# Altium PCB Player.PcbDoc
Units mm, origin at the board's own origin, x right, y up, seen from the top; angles counter-clockwise.
Board outline 30 x 70 mm, 6 copper layers (Top Layer, Mid-Layer 1, Mid-Layer 2, Mid-Layer 3, Mid-Layer 4, Bottom Layer); 111 components, 92 nets, 486 pads, 99 vias.
Unrouted connection lines stored in the file: 260.
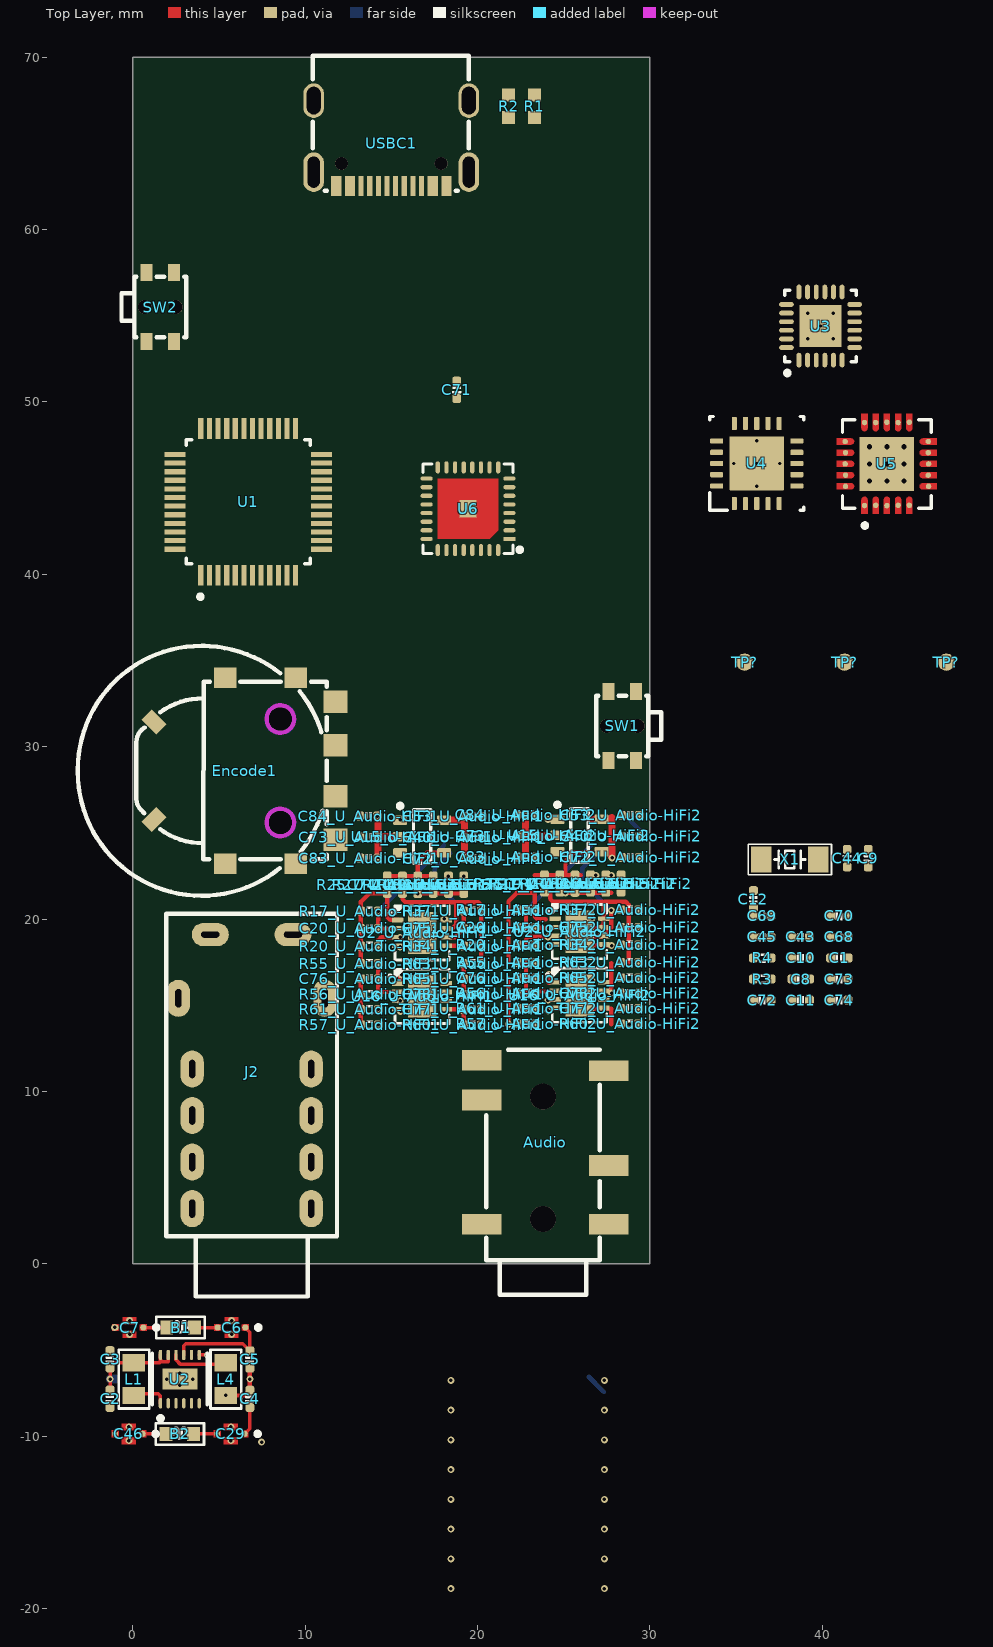
[diagram p0: Top Layer view]
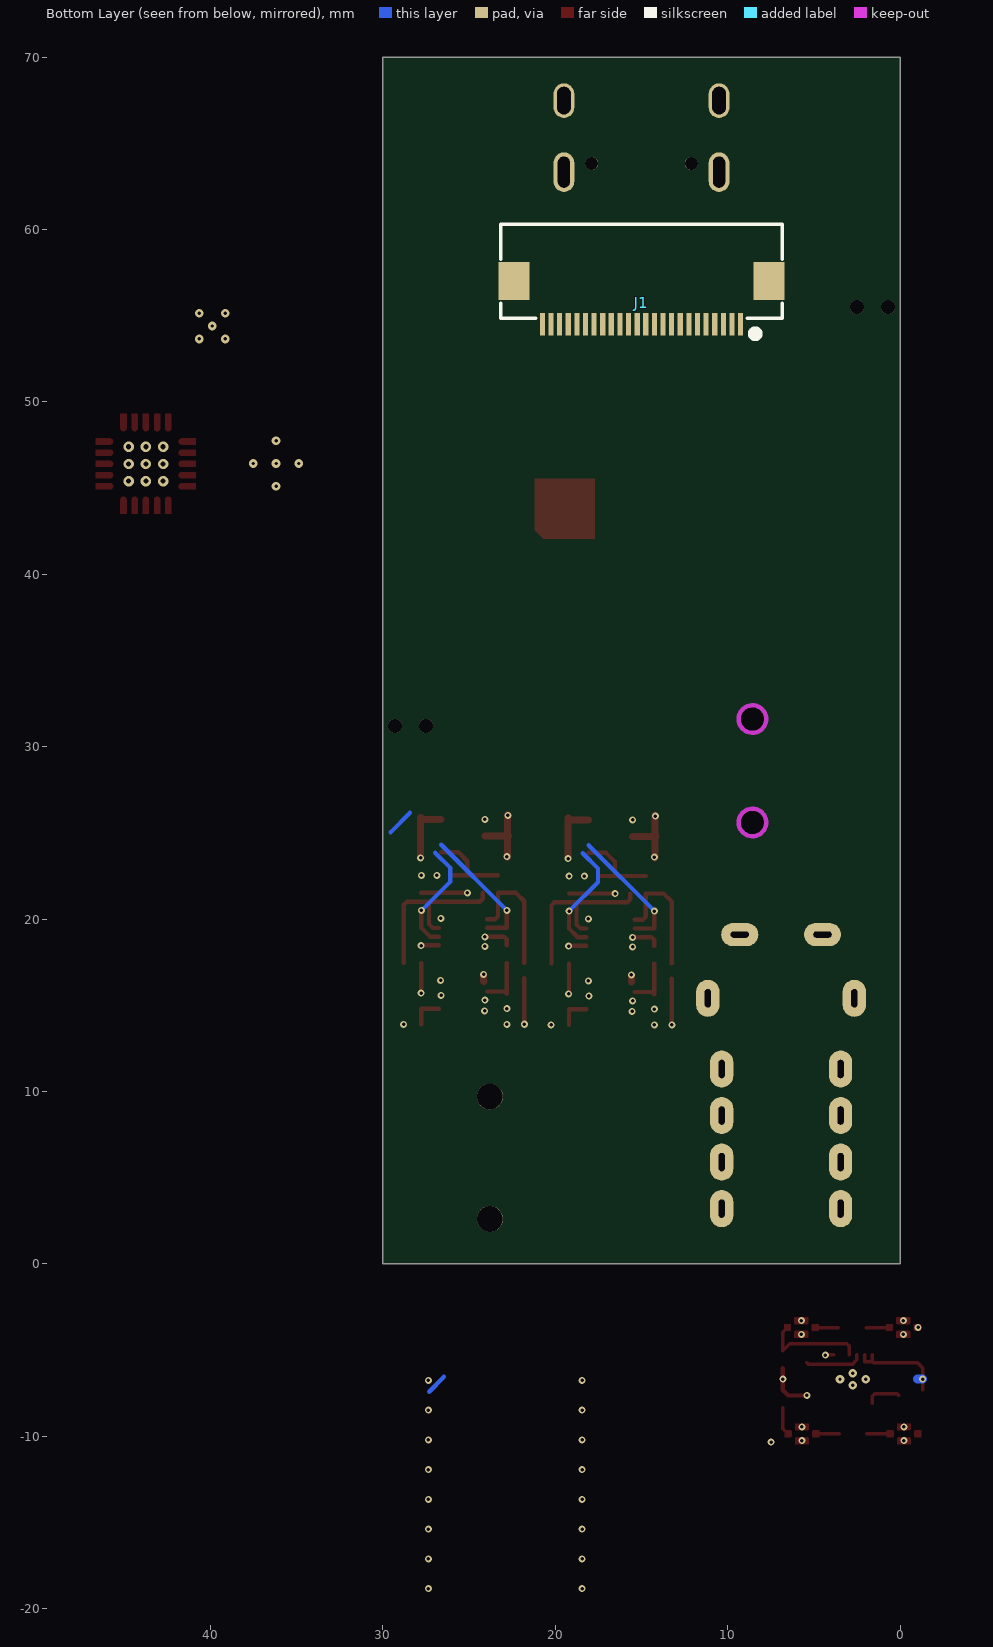
[diagram p1: Bottom Layer view, seen from below]
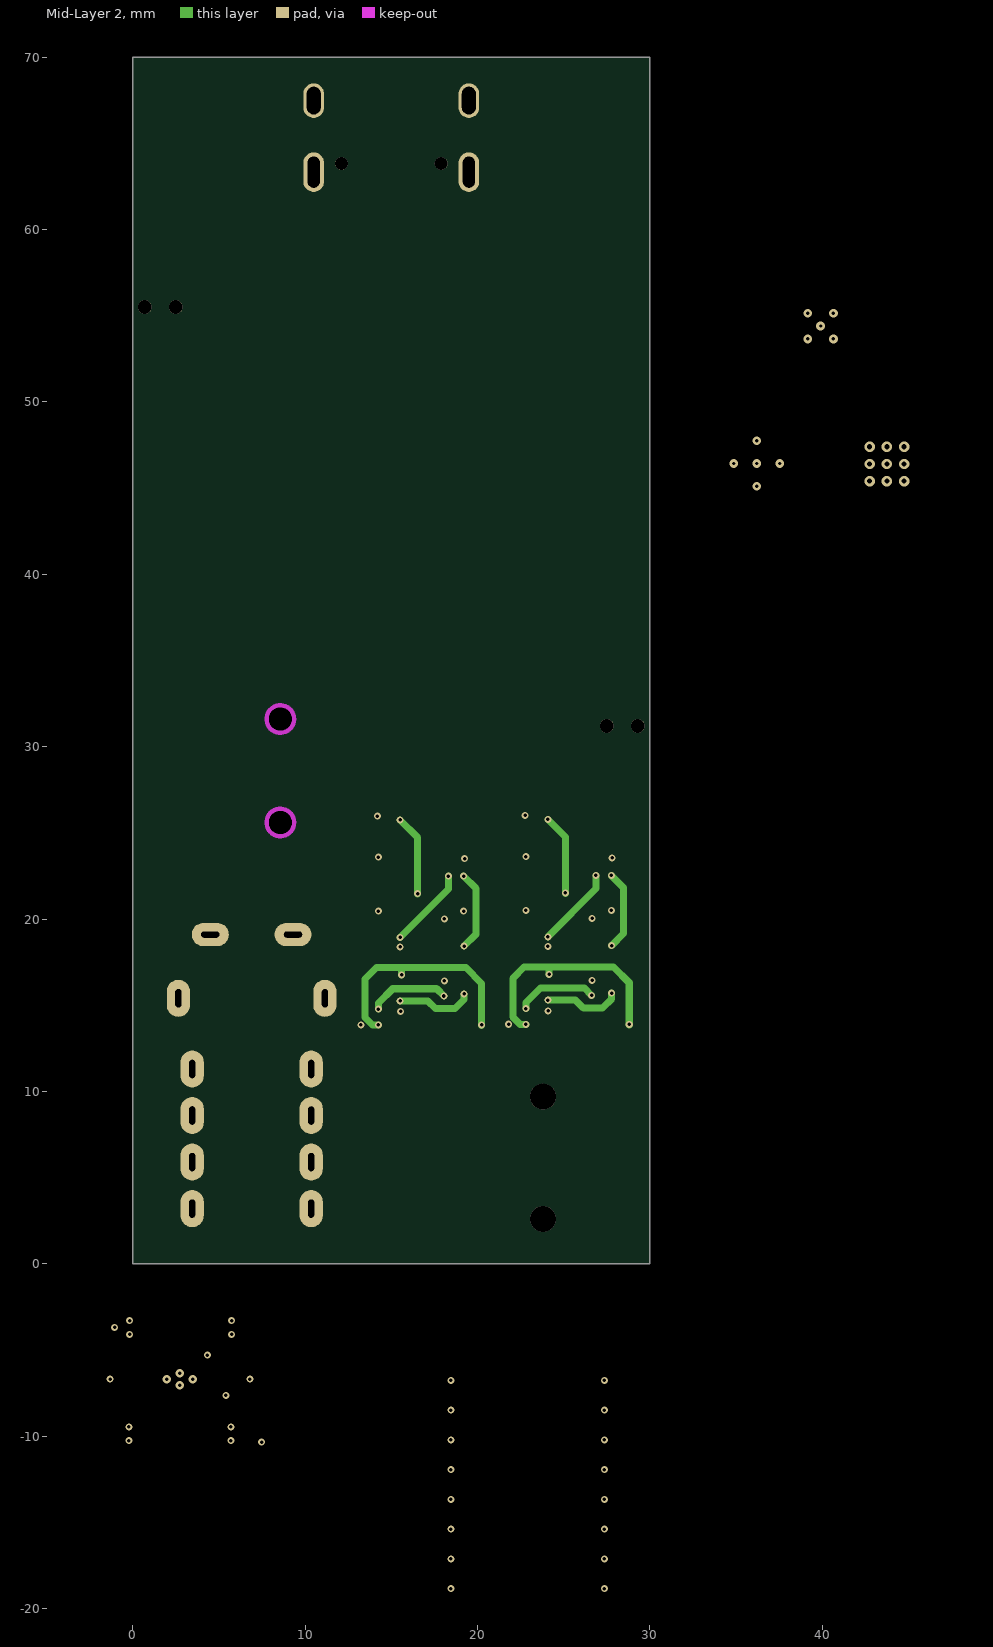
[diagram p2: Mid-Layer 2]
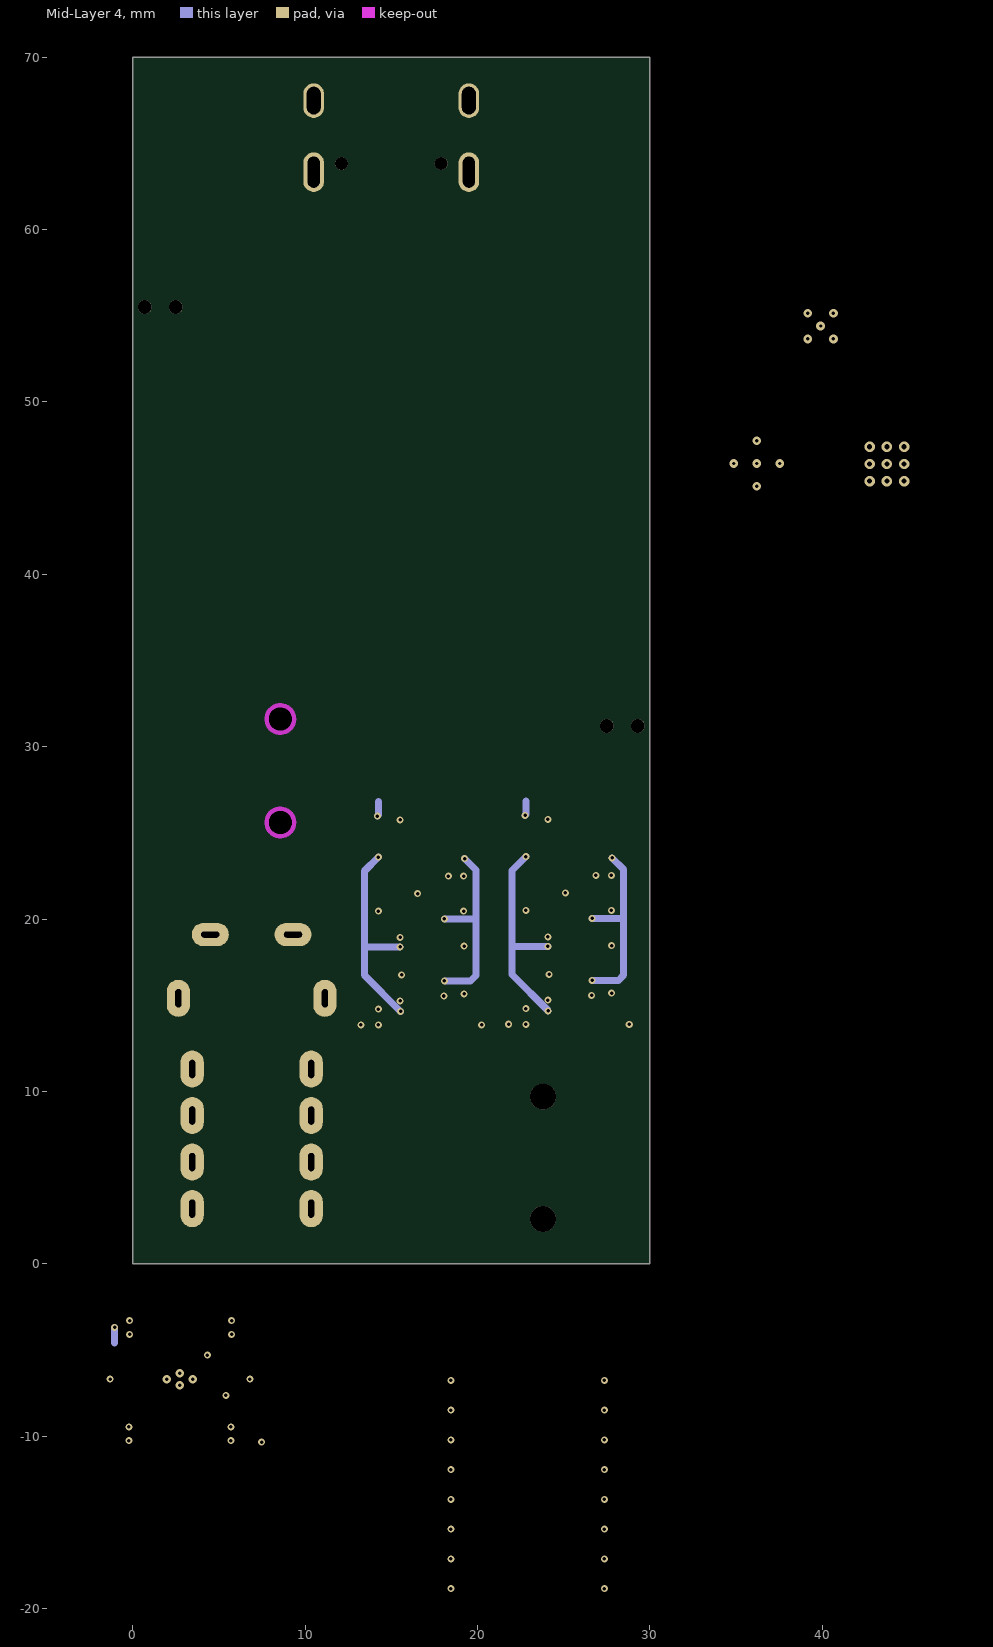
[diagram p3: Mid-Layer 4]

## Layer stack, top to bottom
Top Solder: solder mask 0.0102, Solder Resist, Dk 3.5
Top Layer: signal copper 0.0356
Dielectric 1: dielectric 0.32, FR-4, Dk 4.8
Mid-Layer 1: signal copper 0.0356
Dielectric5: dielectric 0.32, FR-4, Dk 4.8
Mid-Layer 2: signal copper 0.0356
Dielectric2: dielectric 0.32, FR-4, Dk 4.8
Mid-Layer 3: signal copper 0.0356
Dielectric4: dielectric 0.32, FR-4, Dk 4.8
Mid-Layer 4: signal copper 0.0356
Dielectric3: dielectric 0.32, FR-4, Dk 4.8
Bottom Layer: signal copper 0.0356
Bottom Solder: solder mask 0.0102, Solder Resist, Dk 3.5

## Board outline
0,0 0,70 30,70 30,0

## Design rules (kind name [scope] priority, off if disabled: settings)
Clearance [All] p1: gap=0.254 ignorepadtopadclearanceinfootprint=FALSE
DiffPairsRouting [All] p1: maxlimit=0.254 minlimit=0.254 mostfreqgap=0.254 toplayer_minwidth=0.381 toplayer_maxwidth=0.381 toplayer_prefwidth=0.381 midlayer1_minwidth=0.381 midlayer1_maxwidth=0.381 midlayer1_prefwidth=0.381 midlayer2_minwidth=0.381 midlayer2_maxwidth=0.381 midlayer2_prefwidth=0.381 midlayer3_minwidth=0.381 midlayer3_maxwidth=0.381 midlayer3_prefwidth=0.381 midlayer4_minwidth=0.381 midlayer4_maxwidth=0.381 midlayer4_prefwidth=0.381 bottomlayer_minwidth=0.381 bottomlayer_maxwidth=0.381 bottomlayer_prefwidth=0.381 maxuncoupledlength=12.7
PolygonConnect [All] p1: connectstyle=Relief reliefconductorwidth=0.254 reliefentries=4 polygonreliefangle="90 Angle" airgapwidth=0.254
RoomDefinition U_Audio-HiFi2 [InComponentClass('U_Audio-HiFi2')] p1: confinementstyle=ConfineIn formatcopy=TRUE lockcomponents=FALSE outline 12.5,13.1 21,13.1 21,27.1 12.5,27.1
RoomDefinition U_Audio-HiFi1 [InComponentClass('U_Audio-HiFi1')] p2: confinementstyle=ConfineIn formatcopy=TRUE lockcomponents=FALSE outline 21.1,13.1 29.6,13.1 29.6,27.1 21.1,27.1
RoutingVias [All] p1: holewidth=0.711 width=1.27 viastyle="Through Hole" minholewidth=0.711 minwidth=1.27 maxholewidth=0.711 maxwidth=1.27
SolderMaskExpansion [All] p1: expansion=0.102 istentingtop=FALSE
SupplyNets "Schematic Supply Nets_18" [InNet('+3V3')] p1: voltage=0.000
SupplyNets "Schematic Supply Nets_17" [InNet('MCU_+3V3')] p2: voltage=0.000
SupplyNets "Schematic Supply Nets_15" [InNet('MCU_+1V8')] p3: voltage=0.000
SupplyNets "Schematic Supply Nets_5" [InNet('MCU_VCORE')] p4: voltage=0.000
SupplyNets "Schematic Supply Nets" [InNet('Audio_RT1')] p5: voltage=0.000
SupplyNets "Schematic Supply Nets_13" [InNet('DCDC_VCC_Audio')] p6: voltage=0.000
SupplyNets "Schematic Supply Nets_7" [InNet('DCDC_VEE_Audio')] p7: voltage=0.000
SupplyNets "Schematic Supply Nets_6" [InNet('VEE_U_Audio-HiFi1')] p8: voltage=0.000
SupplyNets "Schematic Supply Nets_3" [InNet('VAudio')] p9: voltage=0.000
SupplyNets "Schematic Supply Nets_2" [InNet('VCC_U_Audio-HiFi1')] p10: voltage=0.000
SupplyNets "Schematic Supply Nets_11" [InNet('VBUS')] p11: voltage=0.000
SupplyNets "Schematic Supply Nets_8" [InNet('VLDO1_1.8V')] p12: voltage=0.000
Width [All] p1: maxlimit=0.254 minlimit=0.254 preferedwidth=0.254
29 further rules are at their usual default settings.

## Classes and differential pairs
channel class Audio-HiFi: U_Audio-HiFi1 U_Audio-HiFi2
component class U_Audio-HiFi2: C20_U_Audio-HiFi2 C40_U_Audio-HiFi2 C53_U_Audio-HiFi2 C72_U_Audio-HiFi2 C73_U_Audio-HiFi2 C74_U_Audio-HiFi2 C75_U_Audio-HiFi2 C76_U_Audio-HiFi2 C77_U_Audio-HiFi2 C78_U_Audio-HiFi2 C83_U_Audio-HiFi2 C84_U_Audio-HiFi2 R17_U_Audio-HiFi2 R19_U_Audio-HiFi2 R20_U_Audio-HiFi2 R24_U_Audio-HiFi2 R25_U_Audio-HiFi2 R27_U_Audio-HiFi2 R34_U_Audio-HiFi2 R36_U_Audio-HiFi2 R37_U_Audio-HiFi2 R55_U_Audio-HiFi2 R56_U_Audio-HiFi2 R57_U_Audio-HiFi2 R60_U_Audio-HiFi2 R61_U_Audio-HiFi2 R63_U_Audio-HiFi2 R65_U_Audio-HiFi2 U2_U_Audio-HiFi2 U15_U_Audio-HiFi2 U16_U_Audio-HiFi2
component class U_Audio-HiFi1: C20_U_Audio-HiFi1 C40_U_Audio-HiFi1 C53_U_Audio-HiFi1 C72_U_Audio-HiFi1 C73_U_Audio-HiFi1 C74_U_Audio-HiFi1 C75_U_Audio-HiFi1 C76_U_Audio-HiFi1 C77_U_Audio-HiFi1 C78_U_Audio-HiFi1 C83_U_Audio-HiFi1 C84_U_Audio-HiFi1 R17_U_Audio-HiFi1 R19_U_Audio-HiFi1 R20_U_Audio-HiFi1 R24_U_Audio-HiFi1 R25_U_Audio-HiFi1 R27_U_Audio-HiFi1 R34_U_Audio-HiFi1 R36_U_Audio-HiFi1 R37_U_Audio-HiFi1 R55_U_Audio-HiFi1 R56_U_Audio-HiFi1 R57_U_Audio-HiFi1 R60_U_Audio-HiFi1 R61_U_Audio-HiFi1 R63_U_Audio-HiFi1 R65_U_Audio-HiFi1 U2_U_Audio-HiFi1 U15_U_Audio-HiFi1 U16_U_Audio-HiFi1
component class Player: Audio B1 B2 C1 C2 C3 C4 C5 C6 C7 C8 C9 C10 C11 C12 C29 C43 C44 C45 C46 C68 C69 C70 C71 C72 C73 C74 Encode1 J1 J2 L1 L4 R1 R2 R3 R4 SW1 SW2 U1 U2 U3 U4 U5 U6 USBC1 X1
differential pair Audio_DAC2: +Audio_DAC2_P -Audio_DAC2_N
differential pair Audio_DAC1: +Audio_DAC1_P -Audio_DAC1_N

## Components (designator, comment, footprint, x,y, rotation, side; value= is the part's Value field where it differs from the comment)
Audio "PJ342" PJ342A 23.8,-1.8 r180 top
B1 "BLM15AG601SN1D" L0603 2.773,-3.696 r0 top
B2 "BLM15AG601SN1D" L0603 2.735,-9.865 r0 top
C1 "1uF" 0402-C 40.988,17.739 r0 top value=0.1u
C2 "10uF" 0402-C -1.315,-7.826 r90 top value=0.1u
C3 "0.1uF" 0402-C -1.315,-5.544 r270 top value=0.1u
C4 "10uF" 0402-C 6.799,-7.833 r270 top value=0.1u
C5 "10uF" 0402-C 6.799,-5.547 r90 top value=0.1u
C6 "NFM18PS105D0J3D" FP-NFM18-0_1-e0_05_0_35-MFG 5.732,-3.696 r180 top
C7 "NFM18PS105D0J3D" FP-NFM18-0_1-e0_05_0_35-MFG -0.186,-3.696 r180 top
C8 "10uF" 0402-C 38.753,16.52 r0 top value=0.1u
C9 "0.1uF" 0402-C 42.663,23.528 r90 top value=0.1u
C10 "10p" 0402-C 38.753,17.739 r0 top value=0.1u
C11 "10p" 0402-C 38.753,15.3 r0 top value=0.1u
C12 "0.1uF" 0402-C 36.01,21.142 r90 top value=0.1u
C20_U_Audio-HiFi1 "360p" 0402-C 13.745,19.45 r0 top value=0.1u (schematic designator C20)
C20_U_Audio-HiFi2 "360p" 0402-C 22.871,19.516 r0 top value=0.1u (schematic designator C20)
C29 "NFM18PS105D0J3D" FP-NFM18-0_1-e0_05_0_35-MFG 5.694,-9.865 r180 top
C40_U_Audio-HiFi1 "10u" 0402-C 19.758,24.729 r0 top value=0.1u (schematic designator C40)
C40_U_Audio-HiFi2 "10u" 0402-C 28.884,24.795 r0 top value=0.1u (schematic designator C40)
C43 "0.1uF" 0402-C 38.753,18.958 r0 top value=0.1u
C44 "0.1uF" 0402-C 41.444,23.528 r270 top value=0.1u
C45 "0.1uF" 0402-C 36.518,18.958 r0 top value=0.1u
C46 "NFM18PS105D0J3D" FP-NFM18-0_1-e0_05_0_35-MFG -0.224,-9.865 r180 top
C53_U_Audio-HiFi1 "1u" 0402-C 19.758,25.948 r0 top value=0.1u (schematic designator C53)
C53_U_Audio-HiFi2 "1u" 0402-C 28.884,26.014 r0 top value=0.1u (schematic designator C53)
C68 "1uF" 0402-C 40.988,18.958 r0 top value=0.1u
C69 "1uF" 0402-C 36.518,20.177 r0 top value=0.1u
C70 "1uF" 0402-C 40.988,20.177 r0 top value=0.1u
C71 "1uF" 0402-C 18.8,50.7 r90 top value=0.1u
C72 "1uF" 0402-C 36.518,15.3 r0 top value=0.1u
C72_U_Audio-HiFi1 "0.1u" 0402-C 19.758,23.51 r0 top (schematic designator C72)
C72_U_Audio-HiFi2 "0.1u" 0402-C 28.884,23.576 r0 top (schematic designator C72)
C73 "1uF" 0402-C 40.988,16.52 r0 top value=0.1u
C73_U_Audio-HiFi1 "10u" 0402-C 13.713,24.754 r0 top value=0.1u (schematic designator C73)
C73_U_Audio-HiFi2 "10u" 0402-C 22.839,24.82 r0 top value=0.1u (schematic designator C73)
C74 "1uF" 0402-C 40.988,15.3 r0 top value=0.1u
C74_U_Audio-HiFi1 "360p" 0402-C 16.532,21.986 r270 top value=0.1u (schematic designator C74)
C74_U_Audio-HiFi2 "360p" 0402-C 25.658,22.052 r270 top value=0.1u (schematic designator C74)
C75_U_Audio-HiFi1 "360p" 0402-C 19.714,19.45 r0 top value=0.1u (schematic designator C75)
C75_U_Audio-HiFi2 "360p" 0402-C 28.84,19.516 r0 top value=0.1u (schematic designator C75)
C76_U_Audio-HiFi1 "820p" 0402-C 13.745,16.529 r0 top value=0.1u (schematic designator C76)
C76_U_Audio-HiFi2 "820p" 0402-C 22.871,16.595 r0 top value=0.1u (schematic designator C76)
C77_U_Audio-HiFi1 "1800p" 0402-C 19.714,14.751 r180 top value=0.1u (schematic designator C77)
C77_U_Audio-HiFi2 "1800p" 0402-C 28.84,14.817 r180 top value=0.1u (schematic designator C77)
C78_U_Audio-HiFi1 "820p" 0402-C 19.714,15.64 r180 top value=0.1u (schematic designator C78)
C78_U_Audio-HiFi2 "820p" 0402-C 28.84,15.706 r180 top value=0.1u (schematic designator C78)
C83_U_Audio-HiFi1 "1u" 0402-C 13.713,23.535 r0 top value=0.1u (schematic designator C83)
C83_U_Audio-HiFi2 "1u" 0402-C 22.839,23.601 r0 top value=0.1u (schematic designator C83)
C84_U_Audio-HiFi1 "0.1u" 0402-C 13.687,25.974 r0 top (schematic designator C84)
C84_U_Audio-HiFi2 "0.1u" 0402-C 22.813,26.04 r0 top (schematic designator C84)
Encode1 "SIQ-02FVS3" SW-SMD_SIQ-02FVS3_1 6.5,28.6 r90 top
J1 "YDP290H001-V3" FPC0.5-WT-24P 15,57 r0 bottom locked
J2 "PJ-4.5/PJ-4005" PJ-4.5 6.9,9.2 r270 top
L1 "4.7uH" L0805 0.068,-6.69 r90 top
L4 "4.7uH" L0805 5.402,-6.69 r270 top
R1 "5.1k" 0603-R 23.3,67.15 r90 top
R2 "5.1k" 0603-R 21.8,67.15 r90 top
R3 "10k" 0402-R 36.518,16.52 r0 top
R4 "10k" 0402-R 36.518,17.739 r0 top
R17_U_Audio-HiFi1 "1.8k" 0402-R 13.738,20.462 r180 top (schematic designator R17)
R17_U_Audio-HiFi2 "1.8k" 0402-R 22.864,20.528 r180 top (schematic designator R17)
R19_U_Audio-HiFi1 "4.3" 0402-R 18.317,21.99 r90 top (schematic designator R19)
R19_U_Audio-HiFi2 "4.3" 0402-R 27.443,22.056 r90 top (schematic designator R19)
R20_U_Audio-HiFi1 "3.2k" 0402-R 13.745,18.434 r0 top (schematic designator R20)
R20_U_Audio-HiFi2 "3.2k" 0402-R 22.871,18.5 r0 top (schematic designator R20)
R24_U_Audio-HiFi1 "10k" 0402-R 17.428,21.99 r90 top (schematic designator R24)
R24_U_Audio-HiFi2 "10k" 0402-R 26.554,22.056 r90 top (schematic designator R24)
R25_U_Audio-HiFi1 "10k" 0402-R 14.761,21.99 r90 top (schematic designator R25)
R25_U_Audio-HiFi2 "10k" 0402-R 23.887,22.056 r90 top (schematic designator R25)
R27_U_Audio-HiFi1 "10k" 0402-R 15.65,21.99 r270 top (schematic designator R27)
R27_U_Audio-HiFi2 "10k" 0402-R 24.776,22.056 r270 top (schematic designator R27)
R34_U_Audio-HiFi1 "3.2k" 0402-R 19.714,18.434 r0 top (schematic designator R34)
R34_U_Audio-HiFi2 "3.2k" 0402-R 28.84,18.5 r0 top (schematic designator R34)
R36_U_Audio-HiFi1 "4.3" 0402-R 19.206,21.99 r90 top (schematic designator R36)
R36_U_Audio-HiFi2 "4.3" 0402-R 28.332,22.056 r90 top (schematic designator R36)
R37_U_Audio-HiFi1 "1.8k" 0402-R 19.714,20.466 r180 top (schematic designator R37)
R37_U_Audio-HiFi2 "1.8k" 0402-R 28.84,20.532 r180 top (schematic designator R37)
R55_U_Audio-HiFi1 "1.6k" 0402-R 13.745,17.418 r0 top (schematic designator R55)
R55_U_Audio-HiFi2 "1.6k" 0402-R 22.871,17.484 r0 top (schematic designator R55)
R56_U_Audio-HiFi1 "348" 0402-R 13.745,15.64 r180 top (schematic designator R56)
R56_U_Audio-HiFi2 "348" 0402-R 22.871,15.706 r180 top (schematic designator R56)
R57_U_Audio-HiFi1 "10" 0402-R 13.745,13.862 r180 top (schematic designator R57)
R57_U_Audio-HiFi2 "10" 0402-R 22.871,13.928 r180 top (schematic designator R57)
R60_U_Audio-HiFi1 "249" 0402-R 19.714,13.862 r180 top (schematic designator R60)
R60_U_Audio-HiFi2 "249" 0402-R 28.84,13.928 r180 top (schematic designator R60)
R61_U_Audio-HiFi1 "10" 0402-R 13.745,14.751 r0 top (schematic designator R61)
R61_U_Audio-HiFi2 "10" 0402-R 22.871,14.817 r0 top (schematic designator R61)
R63_U_Audio-HiFi1 "1.6k" 0402-R 19.714,17.418 r180 top (schematic designator R63)
R63_U_Audio-HiFi2 "1.6k" 0402-R 28.84,17.484 r180 top (schematic designator R63)
R65_U_Audio-HiFi1 "348" 0402-R 19.714,16.529 r0 top (schematic designator R65)
R65_U_Audio-HiFi2 "348" 0402-R 28.84,16.595 r0 top (schematic designator R65)
SW1 "TD-1187SA-250" SW-SMD-3.5*3.0_4P 28.4,31.2 r270 top
SW2 "TD-1187SA-250" SW-SMD-3.5*3.0_4P 1.6,55.5 r90 top
TP? "" "TEST 1" 35.5,34.9 r90 top
TP? "" "TEST 1" 47.2,34.9 r90 top
TP? "" "TEST 1" 41.3,34.9 r90 top
U1 "STM32G431CBT6" FP-LQFP48-5B-MFG 6.7,44.2 r90 top
U2 "TPS65133DPDR" FP-DPD0012A-MFG 2.735,-6.69 r90 top
U2_U_Audio-HiFi1 "AD8066ARZ-R7" DFN-8_L3.0-W3.0-P0.50-BL-EP 16.793,19.196 r270 top (schematic designator U2)
U2_U_Audio-HiFi2 "AD8066ARZ-R7" DFN-8_L3.0-W3.0-P0.50-BL-EP 25.919,19.262 r270 top (schematic designator U2)
U3 "TPS65131RGER" TI-RGE24-2450X2450TP_V 39.9,54.4 r90 top
U4 "TPS7A3301RGWR" RGW0020A_V 36.2,46.425 r90 top
U5 "TPS7A4701RGWT" FP-RGW0020A-MFG 43.75,46.4 r90 top
U6 "ES9039Q2M" "QFN32 5x5_L" 19.45,43.8 r90 top
U15_U_Audio-HiFi1 "LMH6624MF/NOPB" DBV0005A_L 16.788,24.783 r0 top (schematic designator U15)
U15_U_Audio-HiFi2 "LMH6624MF/NOPB" DBV0005A_L 25.914,24.849 r0 top (schematic designator U15)
U16_U_Audio-HiFi1 "AD8066ARZ-R7" DFN-8_L3.0-W3.0-P0.50-BL-EP 16.793,15.513 r270 top (schematic designator U16)
U16_U_Audio-HiFi2 "AD8066ARZ-R7" DFN-8_L3.0-W3.0-P0.50-BL-EP 25.919,15.579 r270 top (schematic designator U16)
USBC1 "USB Type C -16P" USB-C-SMD_16P 15,65 r0 top
X1 "8M" XTAL-3215-2P 38.117,23.453 r0 top

## Footprints (in the part's own frame and the unit in brackets; to place one, negate y for a bottom-side part, rotate by r counter-clockwise, add the part's x,y. Pads: shape width x height; smd on the part's side, far side on the other; paste and mask are expansions set on the pad)
0402-C [mil]
  rrect50% 20x20 smd: 1(-20,0) 2(20,0)
  silkscreen extent -6,-9 6,9, body extent -20,-10 20,10, height 20
0402-R [mil]
  rrect50% 20x20 smd: 1(-20,0) 2(20,0)
  silkscreen extent -6,-10 6,10, body extent -20,-10 20,10, height 14
0603-R [mil] "1/10W贴片电阻"
  rect 30x30 smd: 1(-25.59,0) 2(25.59,0)
  body extent -31,-16 31,16, height 16
DBV0005A_L [mm] "SOT23, 5-Leads, Body 3.05x1.75mm, Pitch 0.95mm, IPC High Density"
  rrect18% 0.8x0.55 smd: 1(-1.275,0.95) 2(-1.275,0) 3(-1.275,-0.95) 4(1.275,-0.95) 5(1.275,0.95)
  silkscreen extent -1.4,-1.55 0.5,1.9, body extent -1.42,-1.46 1.42,1.46, height 1.08
DFN-8_L3.0-W3.0-P0.50-BL-EP [mm]
  rect 0.28x0.665 smd paste+0.051: 1(-0.75,-1.407) 2(-0.25,-1.407) 3(0.25,-1.407) 4(0.75,-1.407) 5(0.75,1.407) 6(0.25,1.407) 7(-0.25,1.407) 8(-0.75,1.407)
  rect 2.45x1.65 smd paste+0.051: 9(0,0)
  silkscreen extent -1.58,-1.93 1.58,1.58, body extent -1.5,-1.51 1.5,1.51, height 1.02
FP-DPD0012A-MFG [mm]
  rrect100% 0.6x0.2 smd paste+0 mask+0: 1(-1.4,1.125) 2(-1.4,0.675) 3(-1.4,0.225) 4(-1.4,-0.225) 5(-1.4,-0.675) 6(-1.4,-1.125) 7(1.4,-1.125) 8(1.4,-0.675) 9(1.4,-0.225) 10(1.4,0.225) 11(1.4,0.675) 12(1.4,1.125)
  rect 1.21x2.02 smd paste-1000 mask+0: 13(0,0)
  silkscreen extent -2.4,-1.6 1.5,1.6, body extent -1.8,-1.65 1.8,1.65, height 0.25
FP-LQFP48-5B-MFG [mm]
  rect 1.2x0.3 smd paste+0 mask+0: 1(-4.25,2.75) 2(-4.25,2.25) 3(-4.25,1.75) 4(-4.25,1.25) 5(-4.25,0.75) 6(-4.25,0.25) 7(-4.25,-0.25) 8(-4.25,-0.75) 9(-4.25,-1.25) 10(-4.25,-1.75) 11(-4.25,-2.25) 12(-4.25,-2.75) 25(4.25,-2.75) 26(4.25,-2.25) 27(4.25,-1.75) 28(4.25,-1.25) 29(4.25,-0.75) 30(4.25,-0.25) 31(4.25,0.25) 32(4.25,0.75) 33(4.25,1.25) 34(4.25,1.75) 35(4.25,2.25) 36(4.25,2.75)
  rect 0.3x1.2 smd paste+0 mask+0: 13(-2.75,-4.25) 14(-2.25,-4.25) 15(-1.75,-4.25) 16(-1.25,-4.25) 17(-0.75,-4.25) 18(-0.25,-4.25) 19(0.25,-4.25) 20(0.75,-4.25) 21(1.25,-4.25) 22(1.75,-4.25) 23(2.25,-4.25) 24(2.75,-4.25) 37(2.75,4.25) 38(2.25,4.25) 39(1.75,4.25) 40(1.25,4.25) 41(0.75,4.25) 42(0.25,4.25) 43(-0.25,4.25) 44(-0.75,4.25) 45(-1.25,4.25) 46(-1.75,4.25) 47(-2.25,4.25) 48(-2.75,4.25)
  silkscreen extent -5.62,-3.6 3.6,3.6, body extent -4.95,-4.95 4.95,4.95, height 0.25
FP-NFM18-0_1-e0_05_0_35-MFG [mm]
  round 0.36 smd paste+0 mask+0: 1(-0.8,0) 2(0,0.4) 2(0,-0.4) 3(0.8,0)
  Top Layer region: -0.4,0.6 0.4,0.6 0.4,0.25 0.35,0.2 -0.35,0.2 -0.4,0.25 -0.4,0.6
  Top Layer region: -0.4,-0.6 0.4,-0.6 0.4,-0.25 0.35,-0.2 -0.35,-0.2 -0.4,-0.25 -0.4,-0.6
  Top Layer region: -1,-0.2 -1,0.2 -0.65,0.2 -0.6,0.15 -0.6,-0.15 -0.65,-0.2 -1,-0.2
  Top Layer region: 1,-0.2 1,0.2 0.65,0.2 0.6,0.15 0.6,-0.15 0.65,-0.2 1,-0.2
  silkscreen extent -1.68,-0.12 -1.43,0.12, body extent -1.1,-0.7 1.1,0.7, height 0.25
FP-RGW0020A-MFG [mm]
  round 0.315 smd paste-1000 mask+0: 1(-2.418,1.3) 2(-2.4,0.65) 3(-2.418,0) 4(-2.4,-0.65) 5(-2.4,-1.3) 6(-1.3,-2.418) 7(-0.65,-2.4) 8(0,-2.418) 9(0.65,-2.4) 10(1.3,-2.4) 11(2.418,-1.3) 12(2.4,-0.65) 13(2.418,0) 14(2.4,0.65) 15(2.4,1.3) 16(1.3,2.418) 17(0.65,2.4) 18(0,2.418) 19(-0.65,2.4) 20(-1.3,2.4)
  rect 3.15x3.15 smd paste-1000 mask+0: 21(0,0)
  Top Layer region: -1.125,2.9 -1.125,2.075 -1.148,1.987 -1.212,1.923 -1.3,1.9 -1.3,1.9 -1.367,1.913 -1.424,1.951 -1.462,2.008 -1.475,2.075 -1.475,2.075 -1.475,2.9
  Top Layer region: -0.475,2.9 -0.475,2.075 -0.498,1.987 -0.563,1.923 -0.65,1.9 -0.65,1.9 -0.717,1.913 -0.774,1.951 -0.812,2.008 -0.825,2.075 -0.825,2.075 -0.825,2.9
  Top Layer region: 0.175,2.9 0.175,2.075 0.152,1.987 0.088,1.923 0,1.9 0,1.9 -0.067,1.913 -0.124,1.951 -0.162,2.008 -0.175,2.075 -0.175,2.075 -0.175,2.9
  Top Layer region: 0.825,2.9 0.825,2.075 0.802,1.987 0.738,1.923 0.65,1.9 0.65,1.9 0.583,1.913 0.526,1.951 0.488,2.008 0.475,2.075 0.475,2.075 0.475,2.9
  Top Layer region: 1.475,2.9 1.475,2.075 1.452,1.987 1.388,1.923 1.3,1.9 1.3,1.9 1.233,1.913 1.176,1.951 1.138,2.008 1.125,2.075 1.125,2.075 1.125,2.9
  Top Layer region: 1.125,-2.9 1.125,-2.075 1.138,-2.008 1.176,-1.951 1.233,-1.913 1.3,-1.9 1.3,-1.9 1.367,-1.913 1.424,-1.951 1.462,-2.008 1.475,-2.075 1.475,-2.075 1.475,-2.9
  Top Layer region: 0.475,-2.9 0.475,-2.075 0.488,-2.008 0.526,-1.951 0.583,-1.913 0.65,-1.9 0.65,-1.9 0.717,-1.913 0.774,-1.951 0.812,-2.008 0.825,-2.075 0.825,-2.075 0.825,-2.9
  Top Layer region: -0.175,-2.9 -0.175,-2.075 -0.162,-2.008 -0.124,-1.951 -0.067,-1.913 0,-1.9 0,-1.9 0.067,-1.913 0.124,-1.951 0.162,-2.008 0.175,-2.075 0.175,-2.075 0.175,-2.9
  Top Layer region: -0.825,-2.9 -0.825,-2.075 -0.812,-2.008 -0.774,-1.951 -0.717,-1.913 -0.65,-1.9 -0.65,-1.9 -0.583,-1.913 -0.526,-1.951 -0.488,-2.008 -0.475,-2.075 -0.475,-2.075 -0.475,-2.9
  Top Layer region: -1.475,-2.9 -1.475,-2.075 -1.462,-2.008 -1.424,-1.951 -1.367,-1.913 -1.3,-1.9 -1.3,-1.9 -1.233,-1.913 -1.176,-1.951 -1.138,-2.008 -1.125,-2.075 -1.125,-2.075 -1.125,-2.9
  Top Layer region: 2.9,1.125 2.075,1.125 2.008,1.138 1.951,1.176 1.913,1.233 1.9,1.3 1.9,1.3 1.913,1.367 1.951,1.424 2.008,1.462 2.075,1.475 2.075,1.475 2.9,1.475
  Top Layer region: 2.9,0.475 2.075,0.475 2.008,0.488 1.951,0.526 1.913,0.583 1.9,0.65 1.9,0.65 1.913,0.717 1.951,0.774 2.008,0.812 2.075,0.825 2.075,0.825 2.9,0.825
  Top Layer region: 2.9,-0.175 2.075,-0.175 2.008,-0.162 1.951,-0.124 1.913,-0.067 1.9,0 1.9,0 1.913,0.067 1.951,0.124 2.008,0.162 2.075,0.175 2.075,0.175 2.9,0.175
  Top Layer region: 2.9,-0.825 2.075,-0.825 2.008,-0.812 1.951,-0.774 1.913,-0.717 1.9,-0.65 1.9,-0.65 1.913,-0.583 1.951,-0.526 2.008,-0.488 2.075,-0.475 2.075,-0.475 2.9,-0.475
  Top Layer region: 2.9,-1.475 2.075,-1.475 2.008,-1.462 1.951,-1.424 1.913,-1.367 1.9,-1.3 1.9,-1.3 1.913,-1.233 1.951,-1.176 2.008,-1.138 2.075,-1.125 2.075,-1.125 2.9,-1.125
  Top Layer region: -2.9,-1.125 -2.075,-1.125 -2.008,-1.138 -1.951,-1.176 -1.913,-1.233 -1.9,-1.3 -1.9,-1.3 -1.923,-1.388 -1.987,-1.452 -2.075,-1.475 -2.075,-1.475 -2.9,-1.475
  Top Layer region: -2.9,-0.475 -2.075,-0.475 -2.008,-0.488 -1.951,-0.526 -1.913,-0.583 -1.9,-0.65 -1.9,-0.65 -1.923,-0.738 -1.987,-0.802 -2.075,-0.825 -2.075,-0.825 -2.9,-0.825
  Top Layer region: -2.9,0.175 -2.075,0.175 -2.008,0.162 -1.951,0.124 -1.913,0.067 -1.9,0 -1.9,0 -1.923,-0.088 -1.987,-0.152 -2.075,-0.175 -2.075,-0.175 -2.9,-0.175
  Top Layer region: -2.9,0.825 -2.075,0.825 -2.008,0.812 -1.951,0.774 -1.913,0.717 -1.9,0.65 -1.9,0.65 -1.923,0.563 -1.987,0.498 -2.075,0.475 -2.075,0.475 -2.9,0.475
  Top Layer region: -2.9,1.475 -2.075,1.475 -2.008,1.462 -1.951,1.424 -1.913,1.367 -1.9,1.3 -1.9,1.3 -1.923,1.212 -1.987,1.148 -2.075,1.125 -2.075,1.125 -2.9,1.125
  silkscreen extent -3.7,-2.58 2.58,2.58, body extent -3,-3 3,3, height 0.25
FPC0.5-WT-24P [mm] "长：16.2mm，宽：5.2mm，高：2mm 淘宝ID:黄晶宝石   店铺网址:https://shop463601444.taobao.com"
  rect 1.8x2.2 smd: 0(-7.4,0) 0(7.4,0)
  rect 0.3x1.3 smd: 1(-5.75,2.497) 2(-5.25,2.497) 3(-4.75,2.497) 4(-4.25,2.497) 5(-3.75,2.497) 6(-3.25,2.497) 7(-2.75,2.497) 8(-2.25,2.497) 9(-1.75,2.497) 10(-1.25,2.497) 11(-0.75,2.497) 12(-0.25,2.497) 13(0.25,2.497) 14(0.75,2.497) 15(1.25,2.497) 16(1.75,2.497) 17(2.25,2.497) 18(2.75,2.497) 19(3.25,2.497) 20(3.75,2.497) 21(4.25,2.497) 22(4.75,2.497) 23(5.25,2.497) 24(5.75,2.497)
  silkscreen extent -8.18,-3.3 8.18,3.23, body extent -8.1,-3.15 8.1,2.85, height 2
L0603 [mil]
  rect 29.5x32 smd: 1(-31.5,0) 2(31.5,0)
  silkscreen extent -55,-25 55,25, body extent -31,-15 32,16, height 16
L0805 [mm] "0805贴片叠层电感"
  rect 1x1.3 smd: 1(-0.95,0) 2(0.95,0)
  silkscreen extent -1.7,-0.89 1.7,0.89, body extent -1,-0.65 1,0.65, height 1.3
PJ342A [mm] "沉板式，有头"
  round 1.5 hole 1.5: 0(0,-4.4) 0(0,-11.5)
  rect 2.3x1.2 smd: 1(-3.81,-4.1) 2(3.556,-4.1) 3(-3.81,-7.5) 4(3.556,-11.3) 5(-3.81,-13) 6(3.556,-13.6)
  silkscreen extent -3.3,-14.22 3.3,0, body extent -4.2,-14.15 4.1,-0.05, height 4.75
PJ-4.5 [mm]
  oval 2.15x1.35 hole 0.35 slot 1.05 at 0 deg paste-2539.97 mask+0.102: 1(5.999,-3.45) 1(6,3.45) 2(3.299,-3.45) 2(3.3,3.45) 3(0.599,-3.45) 3(0.6,3.45) 4(-2.101,-3.45) 4(-2.1,3.45) 5(-6.2,4.25) 6(-6.2,-4.25)
  oval 1.35x2.15 hole 0.35 slot 1.05 at 90 deg paste-2539.97 mask+0.102: 7(-9.9,-2.4) 7(-9.9,2.4)
  silkscreen extent -11.1,-4.95 11.1,4.95
"QFN32 5x5_L" [mm] "32脚，长x宽x高：5x5x0.95mm，脚距：0.5mm"
  rect 0.25x0.7 smd: 1(-1.751,-2.4)
  oval 0.25x0.7 smd: 2(-1.25,-2.4) 3(-0.75,-2.4) 4(-0.25,-2.4) 5(0.25,-2.4) 6(0.75,-2.4) 7(1.25,-2.4) 8(1.75,-2.4) 17(1.75,2.4) 18(1.25,2.4) 19(0.75,2.4) 20(0.25,2.4) 21(-0.25,2.4) 22(-0.75,2.4) 23(-1.25,2.4) 24(-1.75,2.4)
  oval 0.7x0.25 smd: 9(2.4,-1.75) 10(2.4,-1.25) 11(2.4,-0.75) 12(2.4,-0.25) 13(2.4,0.25) 14(2.4,0.75) 15(2.4,1.25) 16(2.4,1.75) 25(-2.4,1.75) 26(-2.4,1.25) 27(-2.4,0.75) 28(-2.4,0.25) 29(-2.4,-0.25) 30(-2.4,-0.75) 31(-2.4,-1.25) 32(-2.4,-1.75)
  rect 1x1 smd: 33(0,0)
  Top Layer region: -1.75,1.75 1.75,1.75 1.75,-1.75 -1.25,-1.75 -1.75,-1.25
  silkscreen extent -2.6,-3.13 2.6,2.6, body extent -2.5,-2.5 2.5,2.5, height 1.01
RGW0020A_V [mm] "QFN, 20-Leads, Body 5x5mm, Pitch 0.65mm, Thermal Pad 3.15x3.15mm, TI Recommended"
  rrect33% 0.75x0.3 smd: 1(-2.325,1.3) 2(-2.325,0.65) 3(-2.325,0) 4(-2.325,-0.65) 5(-2.325,-1.3) 11(2.325,-1.3) 12(2.325,-0.65) 13(2.325,0) 14(2.325,0.65) 15(2.325,1.3)
  rrect33% 0.3x0.75 smd: 6(-1.3,-2.325) 7(-0.65,-2.325) 8(0,-2.325) 9(0.65,-2.325) 10(1.3,-2.325) 16(1.3,2.325) 17(0.65,2.325) 18(0,2.325) 19(-0.65,2.325) 20(-1.3,2.325)
  rrect3% 3.15x3.15 smd paste-1.575: 21(0,0)
  silkscreen extent -2.73,-2.73 2.73,2.73, body extent -2.58,-2.57 2.57,2.58, height 1.01
SW-SMD-3.5*3.0_4P [mm]
  round 0.8 hole 0.8 unplated mask+0: 0(0,0.9) 0(0,-0.9)
  rect 1x0.7 smd mask+0.051: 1(-2,0.8) 2(-2,-0.8) 3(2,-0.8) 4(2,0.8)
  silkscreen extent -1.75,-1.5 1.75,2.25, body extent -2.3,-1.51 2.3,2.24, height 1.33
SW-SMD_SIQ-02FVS3_1 [mm]
  rect 1.2x1.3 smd paste+0 mask+0.05: 1(5.4,-2.964) 2(5.4,1.136) 5(-5.4,1.136) 6(-5.4,-2.964)
  rect 0.85x1.2 smd rot 135 paste+0 mask+0.05: 3(2.828,5.264)
  rect 0.85x1.2 smd rot 45 paste+0 mask+0.05: 4(-2.828,5.264)
  rect 1.3x1.4 smd paste+0 mask+0.05: A(-4,-5.264) B(4,-5.264) C(1.475,-5.264) S(-1.475,-5.264)
  Keep-Out Layer board cut-out: -2.2,-2.064 -2.2,-1.959 -2.255,-1.755 -2.36,-1.573 -2.509,-1.424 -2.691,-1.319 -2.895,-1.264 -3.105,-1.264 -3.309,-1.319 -3.491,-1.424 -3.64,-1.573 -3.746,-1.755 -3.8,-1.959 -3.8,-2.064 -3.8,-2.17 -3.746,-2.373 -3.64,-2.555 -3.491,-2.704 -3.309,-2.81 -3.105,-2.864 -2.895,-2.864 -2.691,-2.81 -2.509,-2.704 -2.36,-2.555 -2.255,-2.373 -2.2,-2.17 -2.2,-2.064 -2.2,-2.064
  Keep-Out Layer board cut-out: 3.8,-2.064 3.8,-1.959 3.745,-1.755 3.64,-1.573 3.491,-1.424 3.309,-1.319 3.105,-1.264 2.895,-1.264 2.691,-1.319 2.509,-1.424 2.36,-1.573 2.254,-1.755 2.2,-1.959 2.2,-2.064 2.2,-2.17 2.254,-2.373 2.36,-2.555 2.509,-2.704 2.691,-2.81 2.895,-2.864 3.105,-2.864 3.309,-2.81 3.491,-2.704 3.64,-2.555 3.745,-2.373 3.8,-2.17 3.8,-2.064 3.8,-2.064
  Keep-Out Layer circle w0.254: c-3,-2.064 r0.8
  Keep-Out Layer circle w0.025: c-3,-2.064 r0.8
  Keep-Out Layer circle w0.254: c3,-2.064 r0.8
  Keep-Out Layer circle w0.025: c3,-2.064 r0.8
  silkscreen extent -7.25,-4.76 7.25,9.69, body extent -7.18,-5.15 7.21,9.64, height 4
"TEST 1" [mm] "测试点1mm"
  round 1 smd paste-1: 1(0,0)
TI-RGE24-2450X2450TP_V [mm] "QFN, 24-Leads, Body 4x4mm, Pitch 0.5mm, Thermal Pad 2.45x2.45mm"
  oval 0.85x0.28 smd: 1(-1.975,1.25) 2(-1.975,0.75) 3(-1.975,0.25) 4(-1.975,-0.25) 5(-1.975,-0.75) 6(-1.975,-1.25) 13(1.975,-1.25) 14(1.975,-0.75) 15(1.975,-0.25) 16(1.975,0.25) 17(1.975,0.75) 18(1.975,1.25)
  oval 0.28x0.85 smd: 7(-1.25,-1.975) 8(-0.75,-1.975) 9(-0.25,-1.975) 10(0.25,-1.975) 11(0.75,-1.975) 12(1.25,-1.975) 19(1.25,1.975) 20(0.75,1.975) 21(0.25,1.975) 22(-0.25,1.975) 23(-0.75,1.975) 24(-1.25,1.975)
  rect 2.45x2.45 smd: 25(0,0)
  silkscreen extent -2.85,-2.07 2.07,2.07, body extent -2,-2 2,2, height 1
USB-C-SMD_16P [mm] "封装库来自淘宝ID:黄晶宝石"
  oval 1.2x2.3 hole 0.7 slot 1.8 at 90 deg: 0(-4.5,-1.675) 0(4.5,-1.675)
  oval 1.2x2 hole 0.8 slot 1.6 at 90 deg: 0(-4.5,2.475) 0(4.5,2.475)
  rect 0.3x1.15 smd: A1(3.35,-2.473) A4(2.55,-2.471) A5(1.25,-2.475) A6(0.25,-2.475) A7(-0.25,-2.473) A9(-2.55,-2.475) A12(-3.35,-2.475) B1(-3.05,-2.475) B4(-2.25,-2.475) B5(-1.75,-2.475) B6(-0.75,-2.475) B7(0.75,-2.473) B9(2.25,-2.471) B12(3.05,-2.473)
  rect 0.3x1.148 smd: A8(1.75,-2.475) B8(-1.25,-2.475)
  round 0.75 hole 0.75 unplated: ""(-2.89,-1.175) ""(2.89,-1.175)
  silkscreen extent -4.56,-2.75 4.5,5.08, body extent -4.45,-2.87 4.49,5.03, height 3.25
XTAL-3215-2P [mm] "3.2*1.5*0.6mm(长宽高)"
  rect 1.2x1.5 smd: 1(-1.65,0) 2(1.65,0)
  silkscreen extent -2.41,-0.89 2.41,0.89, body extent -1.6,-0.75 1.6,0.75, height 0.61

## Part data
Audio: "3.5耳机插座,4Pin", BOM名称=耳机插座, 当前库版本V2023.8.14 @淘宝卖家:黄晶宝石=最新版本发布https://item.taobao.com/item.htm?id=566775463719
B1 B2: library part BEAD
C1 C2 C3 C4 C5 C8 C9 C10 C11 C12 C20_U_Audio-HiFi1 C20_U_Audio-HiFi2 C40_U_Audio-HiFi1 C40_U_Audio-HiFi2 C43 C44 C45 C53_U_Audio-HiFi1 C53_U_Audio-HiFi2 C68 C69 C70 C71 C72 C72_U_Audio-HiFi1 C72_U_Audio-HiFi2 C73 C73_U_Audio-HiFi1 C73_U_Audio-HiFi2 C74 C74_U_Audio-HiFi1 C74_U_Audio-HiFi2 C75_U_Audio-HiFi1 C75_U_Audio-HiFi2 C76_U_Audio-HiFi1 C76_U_Audio-HiFi2 C77_U_Audio-HiFi1 C77_U_Audio-HiFi2 C78_U_Audio-HiFi1 C78_U_Audio-HiFi2 C83_U_Audio-HiFi1 C83_U_Audio-HiFi2 C84_U_Audio-HiFi1 C84_U_Audio-HiFi2: library part 电容-0402, "Capacitor"
C6 C7 C29 C46: library part CMP-06053-000028-1, "CAP FEEDTHRU 1UF 20% 6.3V 0603", Capacitance=1uF, Case Code (Imperial)=0603, Case Code (Metric)=1608, Current=2A, DC Resistance (DCR)=30mR, Max Operating Temperature=125°C, Min Operating Temperature=-55°C, Package Quantity=4000, Tolerance=20%, Voltage Rating=6.3V, Case/Package=0603, Height=0.028inch, Length=0.063inch, Mount="Surface Mount", Packaging="Tape and Reel", Voltage Rating (DC)=6.3V, Width=0.031inch
Encode1: JLCPCB Part Class="Extended Part", LCSC Part Name=拨轮滚轮旋转编码器开关, Manufacturer=MITSUMI(美上美), Add into BOM=yes, Convert to PCB=yes, Datasheet=https://atta.szlcsc.com/upload/public/pdf/source/20220728/2FBC1A98A06DC86460FC69DAE20456FC.pdf, DEVICE=SIQ-02FVS3, Manufacturer Part=SIQ-02FVS3, Supplier=LCSC, Supplier Footprint=SMD, Supplier Part=C2925423, Symbol=SIQ-02FVS3
J1: "鱼鹰光电"
L1 L4: library part L, "贴片小功率电感", BOM名称=小功率贴片电感, 联系下单店铺卖家 免费帮你查找封装="联系下单店铺卖家 免费技术支持"
R1 R2 R3 R4 R17_U_Audio-HiFi1 R17_U_Audio-HiFi2 R19_U_Audio-HiFi1 R19_U_Audio-HiFi2 R20_U_Audio-HiFi1 R20_U_Audio-HiFi2 R24_U_Audio-HiFi1 R24_U_Audio-HiFi2 R25_U_Audio-HiFi1 R25_U_Audio-HiFi2 R27_U_Audio-HiFi1 R27_U_Audio-HiFi2 R34_U_Audio-HiFi1 R34_U_Audio-HiFi2 R36_U_Audio-HiFi1 R36_U_Audio-HiFi2 R37_U_Audio-HiFi1 R37_U_Audio-HiFi2 R55_U_Audio-HiFi1 R55_U_Audio-HiFi2 R56_U_Audio-HiFi1 R56_U_Audio-HiFi2 R57_U_Audio-HiFi1 R57_U_Audio-HiFi2 R60_U_Audio-HiFi1 R60_U_Audio-HiFi2 R61_U_Audio-HiFi1 R61_U_Audio-HiFi2 R63_U_Audio-HiFi1 R63_U_Audio-HiFi2 R65_U_Audio-HiFi1 R65_U_Audio-HiFi2: library part R, "贴片电阻", BOM名称=贴片电阻
  R1 R2 R3 R4: 联系卖家，免费查找封装=唯一出售店铺网址https://shop463601444.taobao.com
  R17_U_Audio-HiFi1 R17_U_Audio-HiFi2 R19_U_Audio-HiFi1 R19_U_Audio-HiFi2 R20_U_Audio-HiFi1 R20_U_Audio-HiFi2 R24_U_Audio-HiFi1 R24_U_Audio-HiFi2 R25_U_Audio-HiFi1 R25_U_Audio-HiFi2 R27_U_Audio-HiFi1 R27_U_Audio-HiFi2 R34_U_Audio-HiFi1 R34_U_Audio-HiFi2 R36_U_Audio-HiFi1 R36_U_Audio-HiFi2 R37_U_Audio-HiFi1 R37_U_Audio-HiFi2 R55_U_Audio-HiFi1 R55_U_Audio-HiFi2 R56_U_Audio-HiFi1 R56_U_Audio-HiFi2 R57_U_Audio-HiFi1 R57_U_Audio-HiFi2 R60_U_Audio-HiFi1 R60_U_Audio-HiFi2 R61_U_Audio-HiFi1 R61_U_Audio-HiFi2 R63_U_Audio-HiFi1 R63_U_Audio-HiFi2 R65_U_Audio-HiFi1 R65_U_Audio-HiFi2: 联系下单店铺卖家 免费帮你查找封装="联系下单店铺卖家 免费技术支持"
SW1 SW2: "小乌龟-侧按4脚开关 带定位柱", 联系下单店铺卖家 免费技术支持="联系下单店铺卖家 免费帮你查找封装"
TP? TP? TP?: library part TEST, "测试点", BOM名称=测试点, 联系下单店铺卖家 免费技术支持="联系下单店铺卖家 免费帮你查找封装"
U1: library part CMP-12105-000030-1, "MAINSTREAM ARM CORTEX-M4+ MCU 17", Ambient Temperature Range High=+85°C, Ambient Temperature Range Low=-40°C, Frequency=170MHz, Manufacturer=STMicroelectronics, Max Junction Temp=+105°C, Max Supply Voltage=3.6V, Min Supply Voltage=1.62V, Package=LQFP48-5B, Temperature="-40°C to +85°C", Automotive=No, Category=IC, ComponentLink2Description=Datasheet, ComponentLink2URL=https://www.st.com/resource/en/datasheet/stm32g431cb.pdf, Core Architecture="Arm Cortex-M4", Data Bus Width=32bits, Device Class L1="Integrated Circuits (ICs)", Device Class L2="Embedded Processors and Controllers", Device Class L3=Microcontrollers, Digikey Description="MAINSTREAM ARM CORTEX-M4+ MCU 17", Height=1.6mm, Interface=I2C,SPI,UART,USART,CAN,USB,LIN,IrDA,I2S, Lead Free=Yes, Manufacturer Part Number=STM32G431CBT6, Memory Size=128KBytes, Memory Type=FLASH, Number Of A/D Converters=1, Number Of Adc Channels=17, Number Of Cores=1, Number Of I2C Channels=3, Number Of I/Os=38, Number Of Pwm Channels=31, Number Of Spi Channels=3, Number Of Timers/Counters=14, Number Of Uart Channels=4, Number Of Usb Channels=1, Octopart=https://octopart.com/stm32g431cbt6-stmicroelectronics-98835224, Ram Size=32KBytes, RoHS=TRUE, Standoff Height=0.05mm, Temperature Range High=+85°C, Temperature Range Low=-40°C
U2: library part CMP-04918-000430-1, "IC REG AMOLED DISPL 2OUT 12WSON", Case/Package=QFN, Max Operating Temperature=85°C, Max Supply Voltage=5V, Min Operating Temperature=-40°C, Min Supply Voltage=2.9V, Output Voltage=-5V, Package Quantity=3000, Lead Free="Lead Free", Mount="Surface Mount", Number of Channels=2, Number of Outputs=2, Number of Pins=12, Packaging="Tape and Reel", Radiation Hardening=No, RoHS Compliant=Yes
U2_U_Audio-HiFi1 U2_U_Audio-HiFi2 U16_U_Audio-HiFi1 U16_U_Audio-HiFi2: "Double Channel Low Power Operational Amplifier, 145 MHz BW, 180 V/us SR, Industrial, 8-pin SOIC (R-8), Reel", Amplifiers Per Package=2, Generic Part Number=AD8066, Input Bias Current=2pA, Input Offset Voltage=400uV, Manufacturer="Analog Devices", Code_JEDEC=MS-012-AA, ComponentLink1Description="Manufacturer URL", ComponentLink1URL=http://www.analog.com/en/index.html, ComponentLink2Description=Datasheet, ComponentLink2URL=http://www.analog.com/static/imported-files/data_sheets/AD8065_8066.pdf, ComponentLink3Description="Package Specification", ComponentLink3URL=http://www.analog.com/static/imported-files/packages/PKG_PDF/SOIC_Narrow%20(R)/R_8.pdf, ComponentLink4Description="Reference Circuit", ComponentLink4URL=http://www.analog.com/en/all-operational-amplifiers-op-amps/operational-amplifiers-op-amps/ad8066/products/product.html#product-recommendations, DatasheetVersion="Rev. J", Iq/Amp=7.4mA, Mounting Technology="Surface Mount", PackageDescription="8-Pin Standard Small Outline Package, Body 3.9 x 4.9 mm, Pitch 1.27 mm", PackageReference=R-8, PackageVersion=060506-A, PartNumber=AD8066ARZ-R7, RevisionNote="Reference Circuit URL fixed", Slew Rate=180V/us, Small Signal Bandwidth=145MHz, V Span Max=24V, V Span Min=5V
U3: library part CMP-0388-00557-1, "Postive and Negative Output DC-DC Converter, 2.7 to 5.5 V, -40 to 85 degC, 24-pin QFN (RGE24), Green (RoHS & no Sb/Br)", Manufacturer="Texas Instruments", Rating=Catalog, Switching Frequency(Typ)(kHz)=1400, Code_JEDEC=MO-220, ComponentLink1Description="Manufacturer URL", ComponentLink1URL=http://www.ti.com/, ComponentLink2Description=Datasheet, ComponentLink2URL=http://www.ti.com/general/docs/lit/getliterature.tsp?genericPartNumber=TPS65131&fileType=pdf, ComponentLink3Description="Package Specification", ComponentLink3URL=http://www.ti.com/litv/pdf/mpqf124f, DatasheetVersion=SLVS493B, Eco-Plan="Green (RoHS & no Sb/Br)", Iq(Typ)(mA)=0.5, Mounting Technology="Surface Mount", PackageDescription="24-Pin Plastic Flat Pack, Body 4 x 4 mm, 0.5 mm Pitch", PackageReference=RGE24-2450X2450TP, PackageVersion=4204104/G, PartNumber=TPS65131RGER, SubFamily="LCD/OLED Display Bias Solutions", Synchronous Rectification=TRUE, Topology="Boost, Inverting Buck/Boost", Vin(Max)(V)=5.5, Vin(Min)(V)=2.7
U4: library part CMP-0395-01391-2, "Single Output High PSRR LDO, 1 A, Adjustable -1.18 to -33 V Output, -3 to -36 V Input, with Ultra-Low Noise, 20-pin VQFN (RGW), -40 to 125 degC, Green (RoHS & no Sb/Br)", Manufacturer="Texas Instruments", Accuracy(%)=1.5, Code_JEDEC=MO-220, ComponentLink1Description="Manufacturer URL", ComponentLink1URL=http://www.ti.com/, ComponentLink2Description=Datasheet, ComponentLink2URL=http://www.ti.com/general/docs/lit/getliterature.tsp?genericPartNumber=TPS7A3301&fileType=pdf, ComponentLink3Description="Package Specification", ComponentLink3URL=http://www.ti.com/litv/pdf/mpqf122b, DatasheetVersion=SBVS169B, Eco-Plan="Green (RoHS & no Sb/Br)", Iout(Max)(A)=1, Iq(Typ)(mA)=0.21, Mounting Technology="Surface Mount", PackageDescription="20-Pin Plastic Quad Flat No-Pin, 5 x 5 mm Body, 0.65 mm Pitch, 3.15 x 3.15 mm Exposed Pad", PackageReference=RGW0020A, PartNumber=TPS7A3301RGWR, SubFamily="Single Channel LDO", Vdo(Typ)(mV)=290, Vin(Max)(V)=-36, Vin(Min)(V)=-3, Vout Adj(Max)(V)=-33, Vout Adj(Min)(V)=-1.18
U5: library part CMP-04917-000017-1, "IC REG LINEAR POS ADJ 1A 20VQFN", Dropout Voltage=307mV, Manufacturer="Texas Instruments", Max Junction Temp=+125°C, Max Supply Voltage=35V, Min Supply Voltage=3V, Nominal Supply Current=0.58-6.1mA, Output Current=1A, Output Voltage=1.4-34mV, Package=RGW0020A, Temperature="-40°C to +125°C", Temperature Range Low=-40°C, Accuracy Percentage=2.5%, Automotive=No, Category=IC, ComponentLink2Description=Datasheet, ComponentLink2URL=http://www.ti.com/lit/ds/symlink/tps7a47.pdf, Device Class L1="Integrated Circuits (ICs)", Device Class L2="Power Management ICs", Device Class L3="Voltage Regulators - Linear", Digikey Description="IC REG LINEAR POS ADJ 1A 20VQFN", Height=1mm, Lead Free=Yes, Manufacturer Part Number=TPS7A4701RGWT, Mouser Description="LDO Voltage Regulators 36V 1A 4.17uVRMS RF LDO VTG Reg", Number of Outputs=1, Octopart=https://octopart.com/tps7a4701rgwt-texas+instruments-30261754, Output Type=AdjustableProgrammable, RoHS=TRUE, Standoff Height=0mm, Temperature Range High=+125°C
U15_U_Audio-HiFi1 U15_U_Audio-HiFi2: library part CMP-0055-01252-3, "Single/ Dual Ultra Low Noise Wideband Operational Amplifier, 5-pin SOT-23, Pb-Free", Manufacturer="Texas Instruments", Package Reference=DBV0005A, PackageTopMarking=A94A*XTT, PowerWise=Y, ComponentLink1Description="Datasheet URL", ComponentLink1URL=http://www.ti.com/general/docs/lit/getliterature.tsp?genericPartNumber=LMH6624&fileType=pdf, CompType=Amplifiers, PackageDescription="Molded SOT-23, .115 x .063 x .040 in Body, 5 Lead, .0375 in Pitch", PinCount=5, RoHS=Y
USBC1: library part "USB-Tyoe-C 16P-2.0", "type-C-16pin"
X1: library part XTAL-2P, "2脚无源晶振(谐振器）", BOM名称=2脚无源晶振(谐振器）, 联系下单店铺卖家 免费帮你查找封装="联系下单店铺卖家 免费技术支持"

## Via types
v1: diameter 0.406, hole 0.203, Top Layer to Bottom Layer, tented both sides, 76 vias
v2: diameter 0.5, hole 0.2, Top Layer to Bottom Layer, 14 vias
v3: diameter 0.6, hole 0.3, Top Layer to Bottom Layer, 9 vias

## Nets (pads, with @x,y where several pads share a name; then routed paths per layer and width w, separated by ;. In a path a pad name is that pad's centre, name@x,y a point inside that pad or via, vN(x,y) a via of type N, cw(c..) or ccw(c..) an arc to the next point about the centre after c; other vN are vias at no path point)
+3V3: C69.2 J1.15 J1.16 U6.1 U6.8 U6.10 U6.31
Audio_CS: U1.12 U6.19
Audio_DAC1_N: C20_U_Audio-HiFi2.2 R17_U_Audio-HiFi2.1 U2_U_Audio-HiFi2.2 U6.2 | length 7.5
  Top Layer w0.254: v1@22.816,20.499 22.816,19.483 23.945,19.483 23.949,19.479
  Bottom Layer w0.254: v1(22.809,20.495) 26.619,24.305
Audio_DAC1_P: C75_U_Audio-HiFi2.1 R37_U_Audio-HiFi2.2 U2_U_Audio-HiFi2.6 U6.3 | length 6.6
  Top Layer w0.254: 26.764,18.979 27.265,18.979 27.769,19.483 v1@27.769,20.499
  Bottom Layer w0.254: 26.975,23.849 26.086,22.96 26.086,22.171 v1(27.762,20.495)
Audio_DAC2_N: C20_U_Audio-HiFi1.2 R17_U_Audio-HiFi1.1 U2_U_Audio-HiFi1.2 U6.6
Audio_DAC2_P: C75_U_Audio-HiFi1.1 R37_U_Audio-HiFi1.2 U2_U_Audio-HiFi1.6 U6.7
Audio_EN: U6.18
Audio_LED: U6.22
Audio_MISO: U1.41 U6.20
Audio_MODE: U6.29
Audio_MOSI: U1.42 U6.16
Audio_RT1: Audio.1 C1.2 C2.1 C3.1 C4.1 C5.1 C6.2 C7.2 C8.1 C9.1 C10.1 C11.1 C12.2 C29.2 C40_U_Audio-HiFi1.2 C40_U_Audio-HiFi2.2 C43.2 C44.2 C45.2 C46.2 C53_U_Audio-HiFi1.2 C53_U_Audio-HiFi2.2 C68.1 C69.1 C70.1 C71.1 C72.1 C72_U_Audio-HiFi1.2 C72_U_Audio-HiFi2.2 C73.1 C73_U_Audio-HiFi1.1 C73_U_Audio-HiFi2.1 C74.1 C77_U_Audio-HiFi1.1 C77_U_Audio-HiFi2.1 C78_U_Audio-HiFi1.1 C78_U_Audio-HiFi2.1 C83_U_Audio-HiFi1.1 C83_U_Audio-HiFi2.1 C84_U_Audio-HiFi1.1 C84_U_Audio-HiFi2.1 Encode1.C J1.17 L4.2 R1.2 R2.2 R3.1 R65_U_Audio-HiFi1.2 R65_U_Audio-HiFi2.2 SW1.2 SW2.2 TP?.1@35.5,34.9 U1.19 U1.23 U1.35 U1.47 U2.2 U2.4 U2.5 U2.6 U2.8 U2.13 U3.2 U3.3 U3.19 U3.25 U4.7 U4.21 U5.7 U5.21 U6.4 U6.5 U6.11 U6.17 U6.27 U6.30 U6.33 U15_U_Audio-HiFi1.3 U15_U_Audio-HiFi2.3 USBC1.A1 USBC1.A12 USBC1.B1 USBC1.B12
  other v1: -0.224,-10.265 -0.224,-9.465
  other v2: 2.735,-7.04 1.985,-6.69 3.485,-6.69 2.735,-6.34 36.2,45.1 34.875,46.425 36.2,46.425 37.525,46.425 36.2,47.75 39.15,53.65 40.65,53.65 39.9,54.4 39.15,55.15 40.65,55.15
  other v3: 42.75,45.4 43.75,45.4 44.75,45.4 42.75,46.4 43.75,46.4 44.75,46.4 42.75,47.4 43.75,47.4 44.75,47.4
Audio_SCLK: U1.40 U6.15
Audio_SW1: Audio.5 U6.25
Audio_SW2: Audio.6 U6.26
Audio_VO1: Audio.3 C76_U_Audio-HiFi2.1 R56_U_Audio-HiFi2.2 R57_U_Audio-HiFi2.2 R61_U_Audio-HiFi2.1 | length 2.7
  Top Layer w0.254: v1(21.8,13.895) 21.8,16.562
Audio_VO2: Audio.4 C76_U_Audio-HiFi1.1 R56_U_Audio-HiFi1.2 R57_U_Audio-HiFi1.2 R61_U_Audio-HiFi1.1
AudioPWR_EN: U2.7 U6.28
DBG_RX: U1.11
DBG_TX: U1.10
DCDC_VCC_Audio: C5.2 C6.1 U2.3
DCDC_VEE_Audio: C4.2 C29.1 U2.9
ENC_A: C43.1 Encode1.A
ENC_B: C45.1 Encode1.B
ENC_S: C44.1 Encode1.S
I2S1_CK: U1.27 U6.12
I2S1_MCK: U1.30 U6.32
I2S1_SDO: U1.29 U6.14
I2S1_WS: U1.26 U6.13
LCD_CS: J1.12
LCD_DC: J1.11
LCD_MOSI: J1.14
LCD_RST: J1.10
LCD_SCK: J1.13
LCD_TE: J1.9
MCU_+3V3: C8.2 C9.2 R4.1 U1.1 U1.20 U1.21 U1.24 U1.36 U1.48
NetB1_1: B1.1 C7.1
NetB1_2: B1.2 C6.3
NetB2_1: B2.1 C46.1
NetB2_2: B2.2 C29.3
NetC1_1: C1.1 U6.9
NetC10_2: C10.2 U1.5 X1.2
NetC11_2: C11.2 U1.6 X1.1
NetC12_1: C12.1 R4.2 U1.7
NetC20_U_Audio-HiFi1_1: C20_U_Audio-HiFi1.1 R17_U_Audio-HiFi1.2 R20_U_Audio-HiFi1.1 R25_U_Audio-HiFi1.1 R55_U_Audio-HiFi1.1 U2_U_Audio-HiFi1.1
NetC20_U_Audio-HiFi2_1: C20_U_Audio-HiFi2.1 R17_U_Audio-HiFi2.2 R20_U_Audio-HiFi2.1 R25_U_Audio-HiFi2.1 R55_U_Audio-HiFi2.1 U2_U_Audio-HiFi2.1 | length 7.4
  Top Layer w0.254: 21.8,17.451 21.8,19.483 21.8,20.499 21.8,21.035 22.28,21.515 23.324,21.515 23.324,20.157 23.502,19.979 23.949,19.979
NetC68_2: C68.2 J1.5
NetC70_2: C70.2 J1.18
NetC71_2: C71.2 J1.20
NetC72_2: C72.2 J1.21
NetC73_2: C73.2 J1.22
NetC74_2: C74.2 J1.24
NetC74_U_Audio-HiFi1_1: C74_U_Audio-HiFi1.1 R24_U_Audio-HiFi1.2 R25_U_Audio-HiFi1.2 R27_U_Audio-HiFi1.1 U15_U_Audio-HiFi1.4
NetC74_U_Audio-HiFi1_2: C74_U_Audio-HiFi1.2 R19_U_Audio-HiFi1.1 R24_U_Audio-HiFi1.1 R36_U_Audio-HiFi1.1 U15_U_Audio-HiFi1.1
NetC74_U_Audio-HiFi2_1: C74_U_Audio-HiFi2.1 R24_U_Audio-HiFi2.2 R25_U_Audio-HiFi2.2 R27_U_Audio-HiFi2.1 U15_U_Audio-HiFi2.4 | length 5.2
  Top Layer w0.254: 23.324,22.531 24.213,22.531 25.102,22.531 ; 25.991,22.531 25.102,22.531 ; 26.624,23.863 26.62,23.867 25.623,23.867 25.102,23.347 25.102,22.531
NetC74_U_Audio-HiFi2_2: C74_U_Audio-HiFi2.2 R19_U_Audio-HiFi2.1 R24_U_Audio-HiFi2.1 R36_U_Audio-HiFi2.1 U15_U_Audio-HiFi2.1 | length 7.4
  Top Layer w0.254: v1@25.102,21.515 27.769,21.515
  Mid-Layer 2 w0.406: v1(24.079,25.778) 25.095,24.762 v1@25.095,21.485
  other v1: 25.095,21.511
NetC75_U_Audio-HiFi1_2: C75_U_Audio-HiFi1.2 R27_U_Audio-HiFi1.2 R34_U_Audio-HiFi1.2 R37_U_Audio-HiFi1.1 R63_U_Audio-HiFi1.1 U2_U_Audio-HiFi1.7
NetC75_U_Audio-HiFi2_2: C75_U_Audio-HiFi2.2 R27_U_Audio-HiFi2.2 R34_U_Audio-HiFi2.2 R37_U_Audio-HiFi2.1 R63_U_Audio-HiFi2.1 U2_U_Audio-HiFi2.7 | length 10.4
  Top Layer w0.254: 24.213,21.515 24.213,21.173 24.388,20.999 27.33,20.999 ; 26.764,19.479 27.102,19.479 27.33,19.707 27.33,20.999 ; 28.785,17.451 28.785,18.467 28.785,20.499 28.785,20.82 28.606,20.999 27.33,20.999
NetC76_U_Audio-HiFi1_2: C76_U_Audio-HiFi1.2 R55_U_Audio-HiFi1.2 R56_U_Audio-HiFi1.1 U16_U_Audio-HiFi1.2
NetC76_U_Audio-HiFi2_2: C76_U_Audio-HiFi2.2 R55_U_Audio-HiFi2.2 R56_U_Audio-HiFi2.1 U16_U_Audio-HiFi2.2 | length 3
  Top Layer w0.254: 22.816,17.451 22.816,16.562 22.816,15.673 22.939,15.796 23.949,15.796
NetC77_U_Audio-HiFi1_2: C77_U_Audio-HiFi1.2 R60_U_Audio-HiFi1.2 U16_U_Audio-HiFi1.5
NetC77_U_Audio-HiFi2_2: C77_U_Audio-HiFi2.2 R60_U_Audio-HiFi2.2 U16_U_Audio-HiFi2.5 | length 1.9
  Top Layer w0.254: 26.764,14.796 27.757,14.796 27.769,14.784 27.769,13.895
NetC78_U_Audio-HiFi1_2: C78_U_Audio-HiFi1.2 R63_U_Audio-HiFi1.2 R65_U_Audio-HiFi1.1 U16_U_Audio-HiFi1.3
NetC78_U_Audio-HiFi2_2: C78_U_Audio-HiFi2.2 R63_U_Audio-HiFi2.2 R65_U_Audio-HiFi2.1 U16_U_Audio-HiFi2.3 | length 6.2
  Top Layer w0.254: v1@27.769,15.673 27.769,17.451
  Mid-Layer 2 w0.406: v1(24.079,15.288) 25.679,15.288 26.137,14.831 27.254,14.831 27.788,15.364 v1(27.788,15.694)
NetL1_1: L1.1 U2.1
NetL4_1: L4.1 U2.10
NetR1_1: R1.1 USBC1.A5
NetR2_1: R2.1 USBC1.B5
NetR3_2: R3.2 U1.45
NetR19_U_Audio-HiFi1_2: R19_U_Audio-HiFi1.2 R20_U_Audio-HiFi1.2 U2_U_Audio-HiFi1.3
NetR19_U_Audio-HiFi2_2: R19_U_Audio-HiFi2.2 R20_U_Audio-HiFi2.2 U2_U_Audio-HiFi2.3 | length 6.3
  Top Layer w0.254: 22.816,18.467 22.816,18.816 22.98,18.979 v1@23.949,18.979
  Mid-Layer 2 w0.406: v1(24.079,18.971) 26.873,21.765 v1(26.873,22.527)
NetR34_U_Audio-HiFi1_1: R34_U_Audio-HiFi1.1 R36_U_Audio-HiFi1.2 U2_U_Audio-HiFi1.5
NetR34_U_Audio-HiFi2_1: R34_U_Audio-HiFi2.1 R36_U_Audio-HiFi2.2 U2_U_Audio-HiFi2.5 | length 5.7
  Top Layer w0.254: 26.764,18.479 27.757,18.479 v1@27.769,18.467
  Mid-Layer 2 w0.406: v1(27.762,22.527) 28.473,21.816 28.473,19.149 v1(27.788,18.463)
NetR57_U_Audio-HiFi1_1: R57_U_Audio-HiFi1.1 R60_U_Audio-HiFi1.1 U16_U_Audio-HiFi1.1
NetR57_U_Audio-HiFi2_1: R57_U_Audio-HiFi2.1 R60_U_Audio-HiFi2.1 U16_U_Audio-HiFi2.1 | length 13.9
  Top Layer w0.406: 24.148,16.368 24.155,16.375 v1(24.155,16.786)
  Mid-Layer 2 w0.406: v1(22.809,13.891) 22.479,13.891 22.047,14.323 22.047,16.558 22.708,17.218 27.889,17.218 28.804,16.304 v1@28.804,13.865 ; v1(24.155,16.786) 24.155,17.218
  other v1: 28.804,13.891
NetR61_U_Audio-HiFi1_2: R61_U_Audio-HiFi1.2 U16_U_Audio-HiFi1.6 U16_U_Audio-HiFi1.7
NetR61_U_Audio-HiFi2_2: R61_U_Audio-HiFi2.2 U16_U_Audio-HiFi2.6 U16_U_Audio-HiFi2.7 | length 4.7
  Mid-Layer 2 w0.406: v1(22.809,14.805) 22.809,15.151 23.646,15.988 26.199,15.988 v1(26.619,15.567)
NetU3_1: U3.1 U3.24
NetU3_5: U3.5 U3.6
NetU3_13: U3.13 U3.14
PMU_PB: SW1.1
R\E\S\E\T\: SW2.1
SBU1: USBC1.A8
SBU2: USBC1.B8
SWCLK: TP?.1@41.3,34.9 U1.38
SWDIO: TP?.1@47.2,34.9 U1.37
USB_N: U1.33 USBC1.A7 USBC1.B7
USB_P: U1.34 USBC1.A6 USBC1.B6
VAudio: C2.2 C3.2 L1.2 U2.11 U2.12
VBUS: USBC1.A4 USBC1.A9 USBC1.B4 USBC1.B9
VCC_U_Audio-HiFi1: C7.3 C40_U_Audio-HiFi1.1 C40_U_Audio-HiFi2.1 C53_U_Audio-HiFi1.1 C53_U_Audio-HiFi2.1 C72_U_Audio-HiFi1.1 C72_U_Audio-HiFi2.1 U2_U_Audio-HiFi1.8 U2_U_Audio-HiFi2.8 U15_U_Audio-HiFi1.5 U15_U_Audio-HiFi2.5 U16_U_Audio-HiFi1.8 U16_U_Audio-HiFi2.8 | length 14.4
  Top Layer w0.406: 26.624,25.763 27.671,25.763 27.788,25.88 ; v1@27.788,23.594 27.813,23.619 27.813,24.762 27.813,25.88
  Mid-Layer 4 w0.406: v1(26.645,20.038) 28.448,20.038 28.473,20.012 ; v1@26.67,16.431 28.169,16.431 28.484,16.746 28.484,22.872 v1(27.813,23.543)
  other v1: 26.647,16.442
VEE_U_Audio-HiFi1: C46.3 C73_U_Audio-HiFi1.2 C73_U_Audio-HiFi2.2 C83_U_Audio-HiFi1.2 C83_U_Audio-HiFi2.2 C84_U_Audio-HiFi1.2 C84_U_Audio-HiFi2.2 U2_U_Audio-HiFi1.4 U2_U_Audio-HiFi2.4 U15_U_Audio-HiFi1.2 U15_U_Audio-HiFi2.2 U16_U_Audio-HiFi1.4 U16_U_Audio-HiFi2.4 | length 16.9
  Top Layer w0.406: 22.708,24.813 24.074,24.813 ; v1@22.784,23.568 22.784,24.787 v1@22.784,26.057
  Mid-Layer 4 w0.406: 22.047,18.412 v1(24.079,18.412) ; v1(22.758,26.007) 22.809,26.057 22.809,26.845 ; v1(22.809,23.619) 21.996,22.806 21.996,16.786 v1(24.105,14.678)
pads on no net: Audio.0 Audio.2 Encode1.1 Encode1.2 Encode1.3 Encode1.4 Encode1.5 Encode1.6 J1.0 J1.1 J1.2 J1.3 J1.4 J1.6 J1.7 J1.8 J1.19 J1.23 J2.1 J2.2 J2.3 J2.4 J2.5 J2.6 J2.7 SW1.0 SW1.3 SW1.4 SW2.0 SW2.3 SW2.4 U1.2 U1.3 U1.4 U1.8 U1.9 U1.13 U1.14 U1.15 U1.16 U1.17 U1.18 U1.22 U1.25 U1.28 U1.31 U1.32 U1.39 U1.43 U1.44 U1.46 U2_U_Audio-HiFi1.9 U2_U_Audio-HiFi2.9 U3.4 U3.7 U3.8 U3.9 U3.10 U3.11 U3.12 U3.15 U3.16 U3.17 U3.18 U3.20 U3.21 U3.22 U3.23 U4.1 U4.2 U4.3 U4.4 U4.5 U4.6 U4.8 U4.9 U4.10 U4.11 U4.12 U4.13 U4.14 U4.15 U4.16 U4.17 U4.18 U4.19 U4.20 U5.1 U5.2 U5.3 U5.4 U5.5 U5.6 U5.8 U5.9 U5.10 U5.11 U5.12 U5.13 U5.14 U5.15 U5.16 U5.17 U5.18 U5.19 U5.20 U6.21 U6.23 U6.24 U16_U_Audio-HiFi1.9 U16_U_Audio-HiFi2.9 USBC1. USBC1.0
copper on no net: | length 151.4
  Top Layer w0.203: -1.315,-7.318 -1.315,-6.052 -1.318,-6.049 -1.009,-5.74 0.068,-5.74 1.557,-5.74 1.61,-5.688 1.61,-5.565 ; 0.068,-7.64 0.159,-7.549 1.471,-7.549 1.61,-7.688 1.61,-8.09 ; 0.576,-9.865 1.935,-9.865 ; 0.614,-3.696 1.973,-3.696 ; 1.61,-5.29 1.61,-5.565 ; 2.06,-5.29 2.06,-5.674 1.719,-5.674 1.61,-5.565 ; 2.51,-5.29 2.51,-5.576 2.774,-5.84 5.302,-5.84 5.402,-5.74 ; 2.96,-5.29 2.96,-4.764 3.09,-4.633 6.392,-4.633 6.799,-5.039 6.799,-3.963 6.532,-3.696 ; 3.535,-9.865 4.894,-9.865 ; 3.573,-3.696 4.932,-3.696 ; 3.86,-5.29 4.332,-5.29 v1(4.335,-5.293) ; 6.494,-9.865 6.799,-9.56 6.799,-8.341
  Top Layer w0.254: v1(5.402,-7.64) 6.484,-7.64 6.799,-7.325 6.799,-6.055 ; v1(13.237,13.862) 13.237,16.529 ; 13.237,17.418 13.237,19.45 13.237,20.466 13.237,21.002 13.717,21.482 14.761,21.482 14.761,20.124 14.939,19.946 15.386,19.946 ; 14.253,17.418 14.253,16.529 14.253,15.64 14.376,15.763 15.386,15.763 ; 14.253,18.434 14.253,18.783 14.417,18.946 v1@15.386,18.946 ; v1@14.253,20.466 14.253,19.45 15.382,19.45 15.386,19.446 ; 14.761,22.498 15.65,22.498 16.539,22.498 ; 15.65,21.482 15.65,21.14 15.825,20.966 18.767,20.966 ; v1@16.539,21.482 19.206,21.482 ; 17.428,22.498 16.539,22.498 ; 18.061,23.83 18.057,23.834 17.06,23.834 16.539,23.314 16.539,22.498 ; 18.201,14.763 19.194,14.763 19.206,14.751 19.206,13.862 ; 18.201,18.446 19.194,18.446 v1@19.206,18.434 ; 18.201,18.946 18.702,18.946 19.206,19.45 v1@19.206,20.466 ; 18.201,19.446 18.539,19.446 18.767,19.674 18.767,20.966 ; v1@19.206,15.64 19.206,17.418 ; 20.222,17.418 20.222,18.434 20.222,20.466 20.222,20.787 20.043,20.966 18.767,20.966
  Top Layer w0.406: 14.145,24.78 15.511,24.78 ; v1@14.221,23.535 14.221,24.754 v1@14.221,26.024 ; 15.585,16.335 15.592,16.342 v1(15.592,16.753) ; 18.061,25.73 19.108,25.73 19.225,25.847 ; v1@19.225,23.561 19.25,23.586 19.25,24.729 19.25,25.847
  Mid-Layer 2 w0.406: v1(14.246,13.858) 13.916,13.858 13.484,14.29 13.484,16.525 14.145,17.185 19.326,17.185 20.241,16.271 v1@20.241,13.832 ; v1(14.246,14.772) 14.246,15.118 15.083,15.955 17.636,15.955 v1(18.056,15.534) ; v1(15.516,15.255) 17.116,15.255 17.574,14.798 18.691,14.798 19.225,15.331 v1(19.225,15.661) ; v1(15.516,18.938) 18.31,21.732 v1(18.31,22.494) ; v1(15.516,25.745) 16.532,24.729 v1@16.532,21.452 ; v1(15.592,16.753) 15.592,17.185 ; v1(19.199,22.494) 19.91,21.783 19.91,19.116 v1(19.225,18.43)
  Mid-Layer 4 w0.406: -1.05,-4.582 v1(-1.05,-3.693) ; 13.484,18.379 v1(15.516,18.379) ; v1(14.195,25.974) 14.246,26.024 14.246,26.812 ; v1(14.246,23.586) 13.433,22.773 13.433,16.753 v1(15.542,14.645) ; v1(18.082,20.005) 19.885,20.005 19.91,19.979 ; v1@18.107,16.398 19.606,16.398 19.921,16.713 19.921,22.839 v1(19.25,23.51)
  Bottom Layer w0.254: v1(14.246,20.462) 18.056,24.272 ; 18.412,23.816 17.523,22.927 17.523,22.138 v1(19.199,20.462) ; 26.456,-6.559 27.316,-7.418 ; 28.427,26.16 29.563,25.024
  Bottom Layer w0.508: v1(-1.304,-6.69) -0.999,-6.69
  other v1: 18.451,-18.848 27.364,-18.848 18.451,-17.121 27.364,-17.121 18.451,-15.394 27.364,-15.394 18.451,-13.667 27.364,-13.667 18.451,-11.939 27.364,-11.939 7.479,-10.341 5.694,-10.265 18.451,-10.212 27.364,-10.212 5.694,-9.465 18.451,-8.485 27.364,-8.485 18.451,-6.758 27.364,-6.758 6.799,-6.69 -0.186,-4.096 5.732,-4.096 -0.186,-3.296 5.732,-3.296 20.241,13.858 18.084,16.409 16.532,21.478

## Silkscreen, mask and mechanical layers (free items; w line width, h text height)
Mechanical 1:
  lines w0.1: -1.076,-1.593 ccw(c-1.076,-1.593) -1.076,-1.593 ; 89.585,81.286 ccw(c89.585,81.286) 89.585,81.286 ; 103.378,-2.625 ccw(c103.378,-2.625) 103.378,-2.625
  lines w0.254: 0,0 30,0 30,70 0,70 0,0